# EAGLE board rc-driver-dual-rev-b (EAGLE 7.2.0)
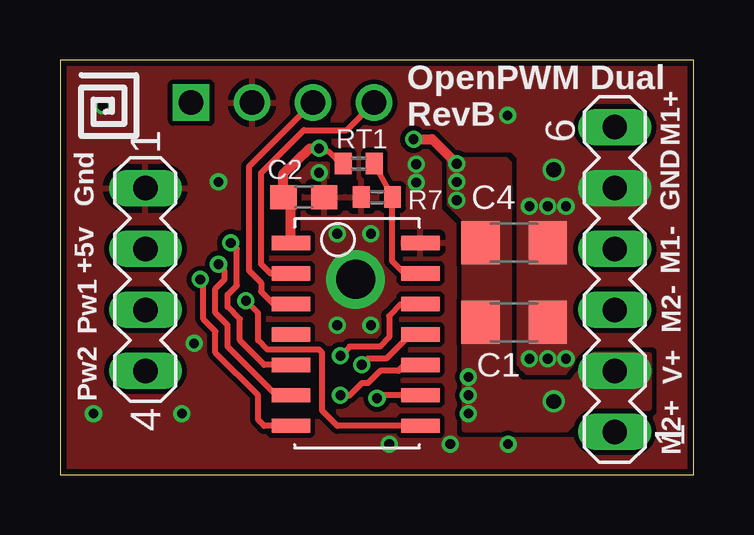
[diagram p0: board, top side]
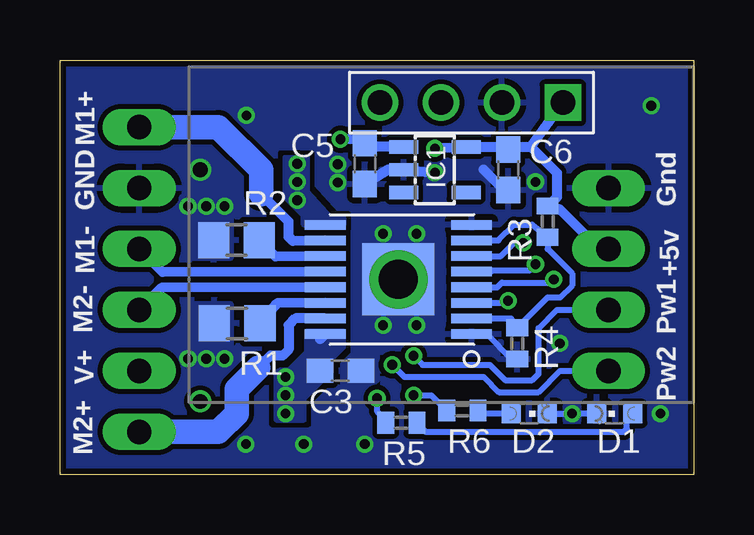
[diagram p1: board, bottom side, seen from below]

Size 26.42 x 17.27 mm. Coordinates in mm from the lower left corner, seen from the top.
Outline: 0,17.27 0,0 26.42,0 26.42,17.27 0,17.27
Copper layers (1*16): Top 0.035mm / dielectric 1.5mm / Bottom 0.035mm
Design rules "SeeedStudio_2layer_DRU_no_angle_20140221 *": minimum track width 6mil, minimum drill 12mil, track to track 8mil, track to pad 8mil, pad to pad 8mil, via to via 8mil, smd to smd 0mil, copper to edge 10mil, drill to drill 10mil, minimum pad ring 10mil, minimum via ring 6mil, stop-mask expansion 2mil, vias tented up to drill 20mil, thermal gap 10mil

## Footprints (pad centres in the part's own frame; a part is rotated, then mirrored left to right if it is on the bottom)
C1206 = smd 1.6 x 1.8: 1 -1.4,0; 2 1.4,0
C0603 = smd 1.1 x 1: 1 -0.85,0; 2 0.85,0
CHIPLED_0603 = smd 0.8 x 0.8: A 0,-0.75; C 0,0.75
SOT23-5 = smd 0.55 x 1.2: 1 -0.95,-1.3; 2 0,-1.3; 3 0.95,-1.3; 4 0.95,1.3; 5 -0.95,1.3
R0805 = smd 1.3 x 1.5: 1 -0.95,0; 2 0.95,0
R0402 = smd 0.7 x 0.9: 1 -0.65,0; 2 0.65,0
MA06-1 = drill 1.016 long: 1 -6.35,0; 2 -3.81,0; 3 -1.27,0; 4 1.27,0; 5 3.81,0; 6 6.35,0
MA04-1 = drill 1.016 long: 1 -3.81,0; 2 -1.27,0; 3 1.27,0; 4 3.81,0
MPU6050-NO-INT = drill 1.016 square: 1 -5.08,0 | drill 1.016: 2 -2.54,0; 3 0,0; 4 2.54,0
SOIC-14-WIDE = smd 0.6 x 1.6: P$1 -3.81,-2.7; P$2 -2.54,-2.7; P$3 -1.27,-2.7; P$4 0,-2.7; P$5 1.27,-2.7; P$6 2.54,-2.7; P$7 3.81,-2.7; P$8 3.81,2.7; P$9 2.54,2.7; P$10 1.27,2.7; P$11 0,2.7; P$12 -1.27,2.7; P$13 -2.54,2.7; P$14 -3.81,2.7
TSSOP-16-LP = smd 0.4 x 1.7: P$1 -2.275,-3.05; P$2 -1.625,-3.05; P$3 -0.975,-3.05; P$4 -0.325,-3.05; P$5 0.325,-3.05; P$6 0.975,-3.05; P$7 1.625,-3.05; P$8 2.275,-3.05; P$9 2.275,3.05; P$10 1.625,3.05; P$11 0.975,3.05; P$12 0.325,3.05; P$13 -0.325,3.05; P$14 -0.975,3.05; P$15 -1.625,3.05; P$16 -2.275,3.05 | smd 3 x 3: P$17 0,0

## Placement (x,y rotation side)
C1  10uF  [C1206]  18.92,6.35 0 top
C2  2.2uF  [C0603]  10.16,11.56 0 top
C3  1uF  [C0603]  14.73,4.32 0 bottom
C4  10uF  [C1206]  18.92,9.65 0 top
C5  1uF  [C0603]  13.72,12.95 270 bottom
C6  2.2uF  [C0603]  7.75,12.7 270 bottom
D1  GREEN  [CHIPLED_0603]  3.3,2.54 90 bottom
D2  RED  [CHIPLED_0603]  6.86,2.54 270 bottom
IC1  [SOT23-5]  10.79,12.7 270 bottom
R1  0.047  [R0805]  19.04,6.3 180 bottom
R2  0.047  [R0805]  19.06,9.76 180 bottom
R3  5.6k  [R0402]  6.1,10.54 270 bottom
R4  1.3k  [R0402]  7.37,5.46 270 bottom
R5  360  [R0402]  12.19,2.16 0 bottom
R6  360  [R0402]  9.65,2.67 0 bottom
R7  5.6k  [R0402]  13.21,11.56 180 top
RT1  10k  [R0402]  12.45,12.95 0 top
SV1  [MA06-1]  23.11,8.13 90 top
SV4  [MA04-1]  3.56,8.13 270 top
U1  MPU6050-NO-INT  [MPU6050-NO-INT]  10.54,15.49 180 bottom
U$1  ATTINY24A  [SOIC-14-WIDE]  12.32,5.84 270 top
U$2  A4954-DUAL-HBRIDGE  [TSSOP-16-LP]  12.32,8.13 90 bottom

## Library data of the parts
C1-C6 R1-R7 RT1 = resistor
D1 D2 = led
IC1 = v-reg-micrel; MF: Texas Instruments; MPN: TPS70950; OC_FARNELL: unknown; OC_NEWARK: unknown
SV1 SV4 = con-lstb; OC_FARNELL: unknown; OC_NEWARK: unknown
U1 = rc-parts
U$1 = rc-parts; MF: Atmel; MPN: ATTINY24A-SSUR
U$2 = rc-parts; MF: Allegro; MPN: A4954

## Nets
+5V: C2.1 C6.1 IC1.5 R3.1 RT1.1 SV4.2 U1.1 U$1.P$1
+12V: C1.1 C3.1 C4.1 C5.1 IC1.1 SV1.2 U$2.P$9 U$2.P$16
GND: C1.2 C2.2 C3.2 C4.2 C5.2 C6.2 D1.C D2.C IC1.2 R1.2 R2.2 R4.2 R7.2 SV1.5 SV4.1 U1.2 U$1.P$14 U$2.P$1 U$2.P$8 U$2.P$17
LED1: R5.1 U$1.P$9
LED2: R6.1 U$1.P$10
MOTOR1-1: SV1.6 U$2.P$10
MOTOR1-2: SV1.4 U$2.P$12
MOTOR2-1: SV1.3 U$2.P$13
MOTOR2-2: SV1.1 U$2.P$15
N$1: R1.1 U$2.P$14
N$2: R2.1 U$2.P$11
N$3: D2.A R6.2
N$4: D1.A R5.2
OUTPUT1: U$1.P$5 U$2.P$6
OUTPUT2: U$1.P$6 U$2.P$5
OUTPUT3: U$1.P$8 U$2.P$3
OUTPUT4: U$1.P$7 U$2.P$4
PWM1: SV4.3 U$1.P$12
PWM2: SV4.4 U$1.P$11
SCL: U1.4 U$1.P$2
SDA: U1.3 U$1.P$3
T-OUT: R7.1 RT1.2 U$1.P$13
VREF: R3.2 R4.1 U$2.P$2 U$2.P$7

## Tracks (layer width: path | path; a pad name or v marks a point on that pad's centre or on a via)
+5V  (via drill 0.41)
  Top 0.254: RT1.1 11.81,12.83 11.18,13.46 11.05,13.46 v10.79,13.59
  Top 0.406: U$1.P$1 9.62,11.23 C2.1 9.31,12.53 10.41,13.59 v10.79,13.59
  Bottom 0.406: 8.06,13.65 IC1.5 9.53,13.62 v10.79,13.59 | 8.06,13.65 C6.1 | 8.06,13.65 6.79,13.65 | 6.79,13.65 5.71,12.57 5.71,11.56 R3.1 5.95,11.05 5.59,11.05 3.94,9.4 SV4.2 | 6.79,13.65 U1.1
+12V  (via drill 0.41, 0.61)
  Top 0.406: v14.73,13.97 15.51,13.97 v16.53,12.95
  Bottom 0.406: 15.58,5.64 U$2.P$16 | IC1.1 13.69,13.65 C5.1 13.8,13.68 14.1,13.97 v14.73,13.97
  other vias: 17.02,3.3 17.02,4.06 16.53,12.19 16.53,11.43 17.02,2.54 20.57,3.05
  pour Top (no thermals): 24.51,2.79 21.97,2.79 21.08,1.91 16.89,1.91 16.89,10.67 16.26,11.3 16.26,13.08 18.54,13.08 18.67,12.95 18.67,4.32 19.18,3.81 21.34,3.81 22.23,4.95 24.51,4.95
  pour Bottom (no thermals): 14.61,10.41 16.26,10.41 16.26,10.79 17.02,11.56 17.02,13.21 16.13,13.21 16.13,11.81 15.11,10.67 14.61,10.67
  pour Bottom (no thermals): 16.13,5.97 16.13,5.08 16.89,4.32 17.27,4.32 17.4,4.19 17.4,2.29 16.26,2.29 16.26,3.17 15.11,4.32 15.11,4.83 14.61,5.33 14.61,5.97
GND  (via drill 0.41, 0.61, 1.63)
  Bottom 0.254: D1.C v5.08,2.54 D2.C | R4.2 7.61,4.81 8.64,5.84 9.26,5.84 U$2.P$1
  Bottom 0.406: C3.2 13.84,4.32 | C5.2 12.74,12.7 IC1.2 v10.79,12.57 | C6.2 7.91,11.85 8.76,12.7
  other vias: 20.32,11.18 20.32,4.83 19.56,11.18 18.65,14.96 19.56,4.83 12.32,8.13 21.08,4.83 21.08,11.18 11.56,6.22 12.95,6.22 12.95,10.03 11.56,10.03 1.4,2.54 5.59,5.46 20.57,12.7 1.78,15.37 6.6,12.19 14.84,12.93 14.84,12.17 16.26,1.27 13.72,1.27 18.67,1.27
  pour Top (rank 2): 26.42,17.27 0,17.26 0,0 26.42,0
  pour Top (no thermals): 19.3,4.45 20.7,4.45 21.46,5.21 21.59,10.41 24.89,10.41 24.89,13.21 19.3,13.21
  pour Bottom (no thermals): 19.3,7.11 19.3,4.57 21.34,4.57 21.34,7.11
  pour Bottom (no thermals): 19.3,11.56 19.3,9.02 21.34,9.02 21.34,11.56
  pour Bottom (no thermals): 10.54,5.46 14.1,5.46 14.1,10.79 10.54,10.79
  pour Bottom (rank 2): 0,0 26.42,0 26.42,17.27 0,17.27
  pour Bottom (rank 3, no thermals): 14.61,4.7 14.1,5.21 13.21,5.21 13.21,3.94 13.72,3.56 13.72,2.79 14.61,2.79
LED1  (via drill 0.41)
  Top 0.254: U$1.P$9 13.34,3.3 v13.21,3.17
  Bottom 0.254: v13.21,3.17 13.21,2.65 R5.1
LED2  (via drill 0.41)
  Top 0.254: U$1.P$10 14.35,4.57 14.1,4.32 13.34,4.32 12.83,3.81 12.57,3.81 12.06,3.3 v11.68,3.3
  Bottom 0.254: v11.68,3.3 10.94,3.3 R6.1
MOTOR1-1
  Bottom 0.406: U$2.P$10 16.71,9.73 16.89,9.91 16.89,10.54 18.03,11.68
  Bottom 1.016: 18.03,11.68 18.03,12.7 19.81,14.48 SV1.6
MOTOR1-2
  Bottom 0.406: U$2.P$12 22.14,8.43 SV1.4
MOTOR2-1
  Bottom 0.406: U$2.P$13 22.19,7.78 SV1.3
MOTOR2-2
  Bottom 0.406: 18.16,4.45 17.65,4.95 17.14,4.95 16.89,5.21 16.89,6.22 16.61,6.5 U$2.P$15
  Bottom 1.016: 18.16,4.45 19.05,3.56 19.05,2.54 19.81,1.78 SV1.1
N$1
  Bottom 0.406: U$2.P$14 17.38,7.13 R1.1
N$2
  Bottom 0.406: U$2.P$11 17.43,9.08 R2.1
N$3
  Bottom 0.254: D2.A 8.88,2.54 R6.2
N$4
  Bottom 0.254: R5.2 11.54,2.14 11.18,1.78 2.92,1.78 2.79,1.91 2.79,2.3 D1.A
OUTPUT1  (via drill 0.41)
  Top 0.254: U$1.P$5 8.51,4.57 7.49,5.59 7.49,6.48 6.99,6.99 6.99,7.49 7.37,7.87 7.37,9.4 v7.11,9.65
  Bottom 0.254: U$2.P$6 8.04,9.1 7.49,9.65 v7.11,9.65
OUTPUT2  (via drill 0.41)
  Top 0.254: U$1.P$6 9.02,3.3 6.99,5.33 6.99,6.22 6.48,6.73 6.48,7.75 6.86,8.13 6.86,8.51 v6.6,8.76
  Bottom 0.254: 6.73,8.64 v6.6,8.76 6.86,8.51 8.38,8.51 8.44,8.45 U$2.P$5
OUTPUT3  (via drill 0.41)
  Top 0.254: U$1.P$8 11.56,2.03 10.92,2.67 10.92,5.08 10.79,5.21 8.64,5.21 8.26,5.59 8.26,6.73 v7.75,7.24
  Bottom 0.254: U$2.P$3 7.83,7.15 v7.75,7.24
OUTPUT4  (via drill 0.41)
  Top 0.254: U$1.P$7 8.51,2.03 8.26,2.29 8.26,3.3 6.48,5.08 6.48,5.97 5.97,6.48 5.97,8 v5.84,8.13
  Bottom 0.254: U$2.P$4 8.2,7.8 8,8 5.97,8 v5.84,8.13
PWM1  (via drill 0.41)
  Top 0.254: U$1.P$12 14.22,7.11 13.72,6.6 13.72,5.71 13.34,5.33 12.06,5.33 v11.68,4.95
  Bottom 0.254: v11.68,4.95 11.3,4.57 8.51,4.57 7.87,3.94 6.73,3.94 6.48,4.19 6.48,6.1 5.71,6.86 SV4.3
PWM2  (via drill 0.41)
  Top 0.254: U$1.P$11 14.61,5.84 13.59,4.83 12.83,4.83 v12.57,4.57
  Bottom 0.254: v12.57,4.57 12.06,4.06 8.76,4.06 8.13,3.43 6.48,3.43 5.59,4.32 SV4.4
SCL
  Top 0.254: U$1.P$2 8.76,8.38 8.38,8.76 8.38,12.57 10.16,14.35 11.94,14.35 U1.4
SDA
  Top 0.254: U$1.P$3 8.89,7.11 8.38,7.62 8.38,8 7.87,8.51 7.87,12.83 U1.3
T-OUT
  Top 0.254: RT1.2 R7.1 13.86,11.57 13.84,11.43 13.84,8.89 14.35,8.38 U$1.P$13
VREF
  Bottom 0.254: U$2.P$2 7.63,6.5 R4.1 | R4.1 7.28,6.13 7.11,6.35 | R4.1 6.11,7.37 5.59,7.37 5.08,7.87 5.08,8.38 6.1,9.4 R3.2 6.75,10.41 7.49,10.41 8.15,9.75 U$2.P$7

## Text on the board
tPlace: OpenPWM Dual | RevB | M1+ | Gnd | GND | +5v | M1- | Pw1 | M2- | V+ | Pw2 | M2+
bPlace: M1+ | Gnd | GND | +5v | M1- | Pw1 | M2- | V+ | Pw2 | M2+